# Altium PCB RcMPPT-SCC.PcbDoc
Units mm, origin at the board's own origin, x right, y up, seen from the top; angles counter-clockwise.
Board outline 99.06 x 55.88 mm, 4 copper layers (Top Layer, Mid Layer 1, Mid Layer 2, Bottom Layer), stack 1.531 mm thick; 156 components, 104 nets, 651 pads, 24 vias.
Unrouted connection lines stored in the file: 341.
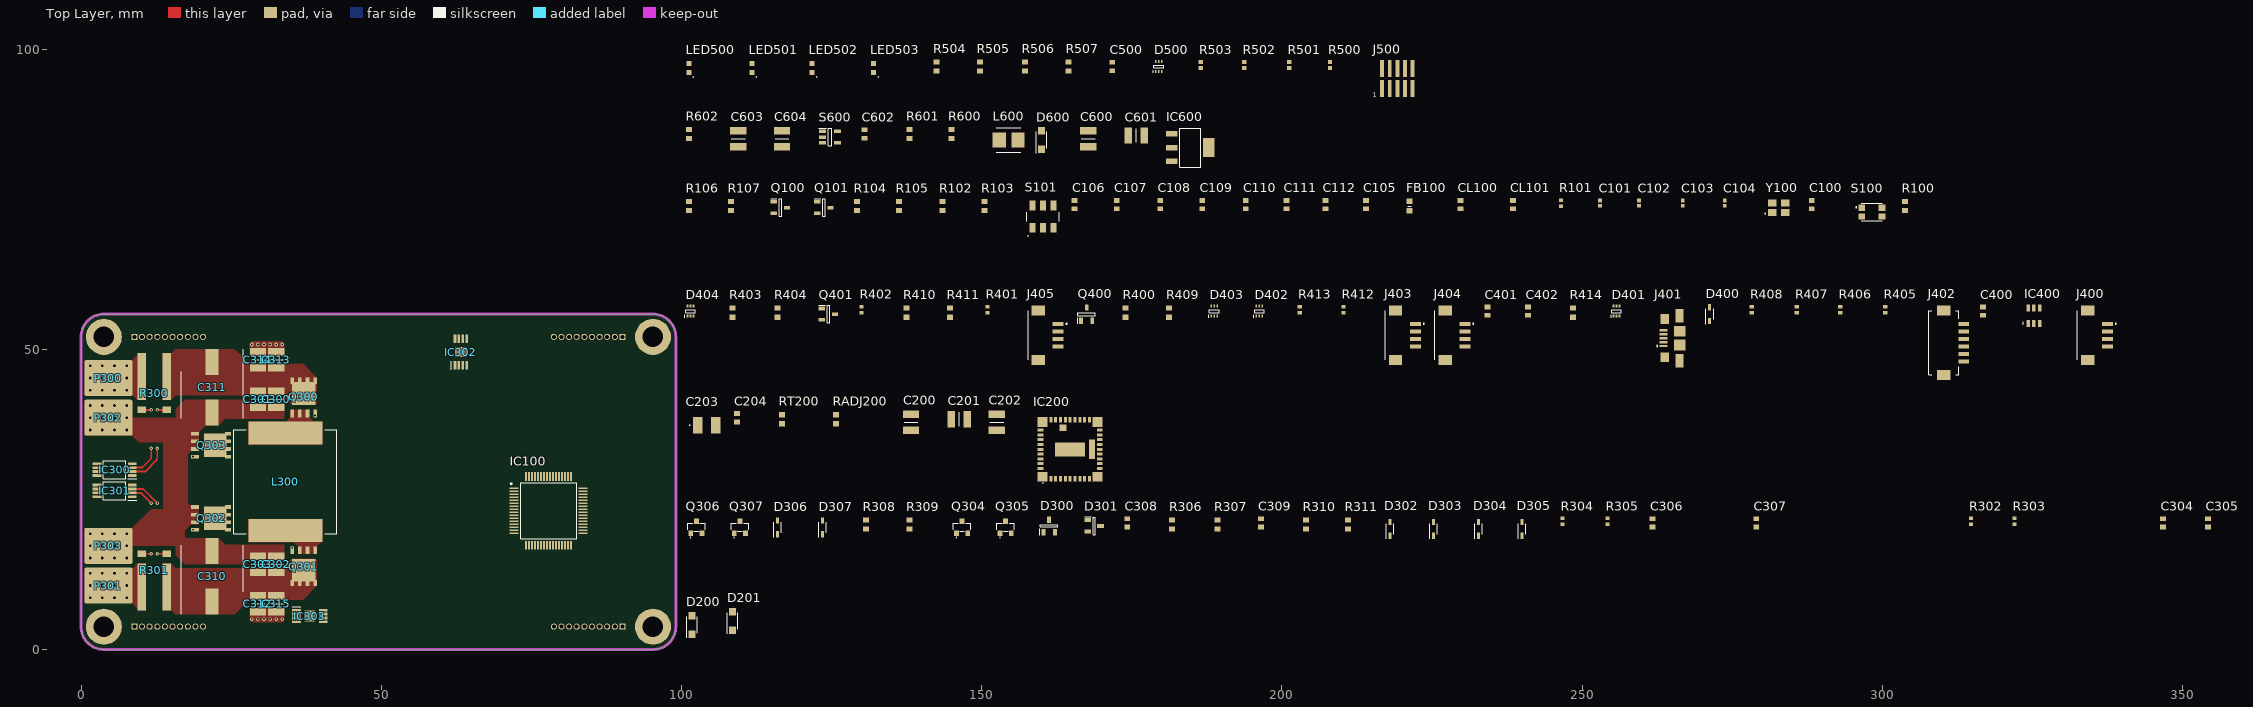
[diagram p0: Top Layer view]
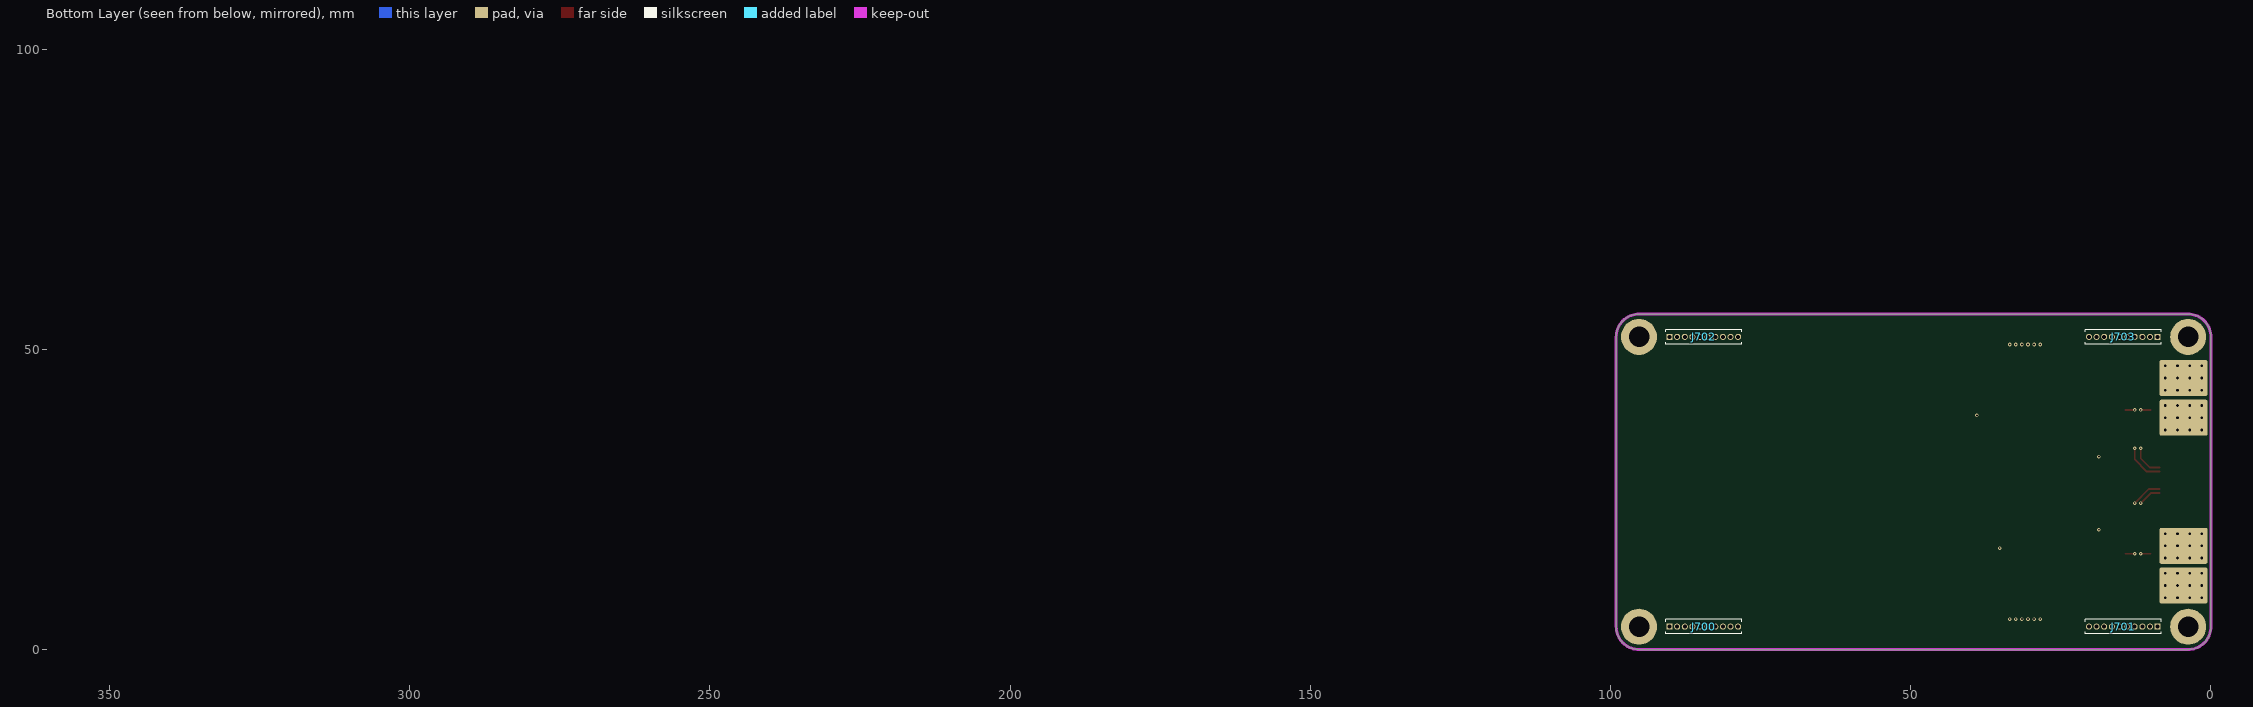
[diagram p1: Bottom Layer view, seen from below]
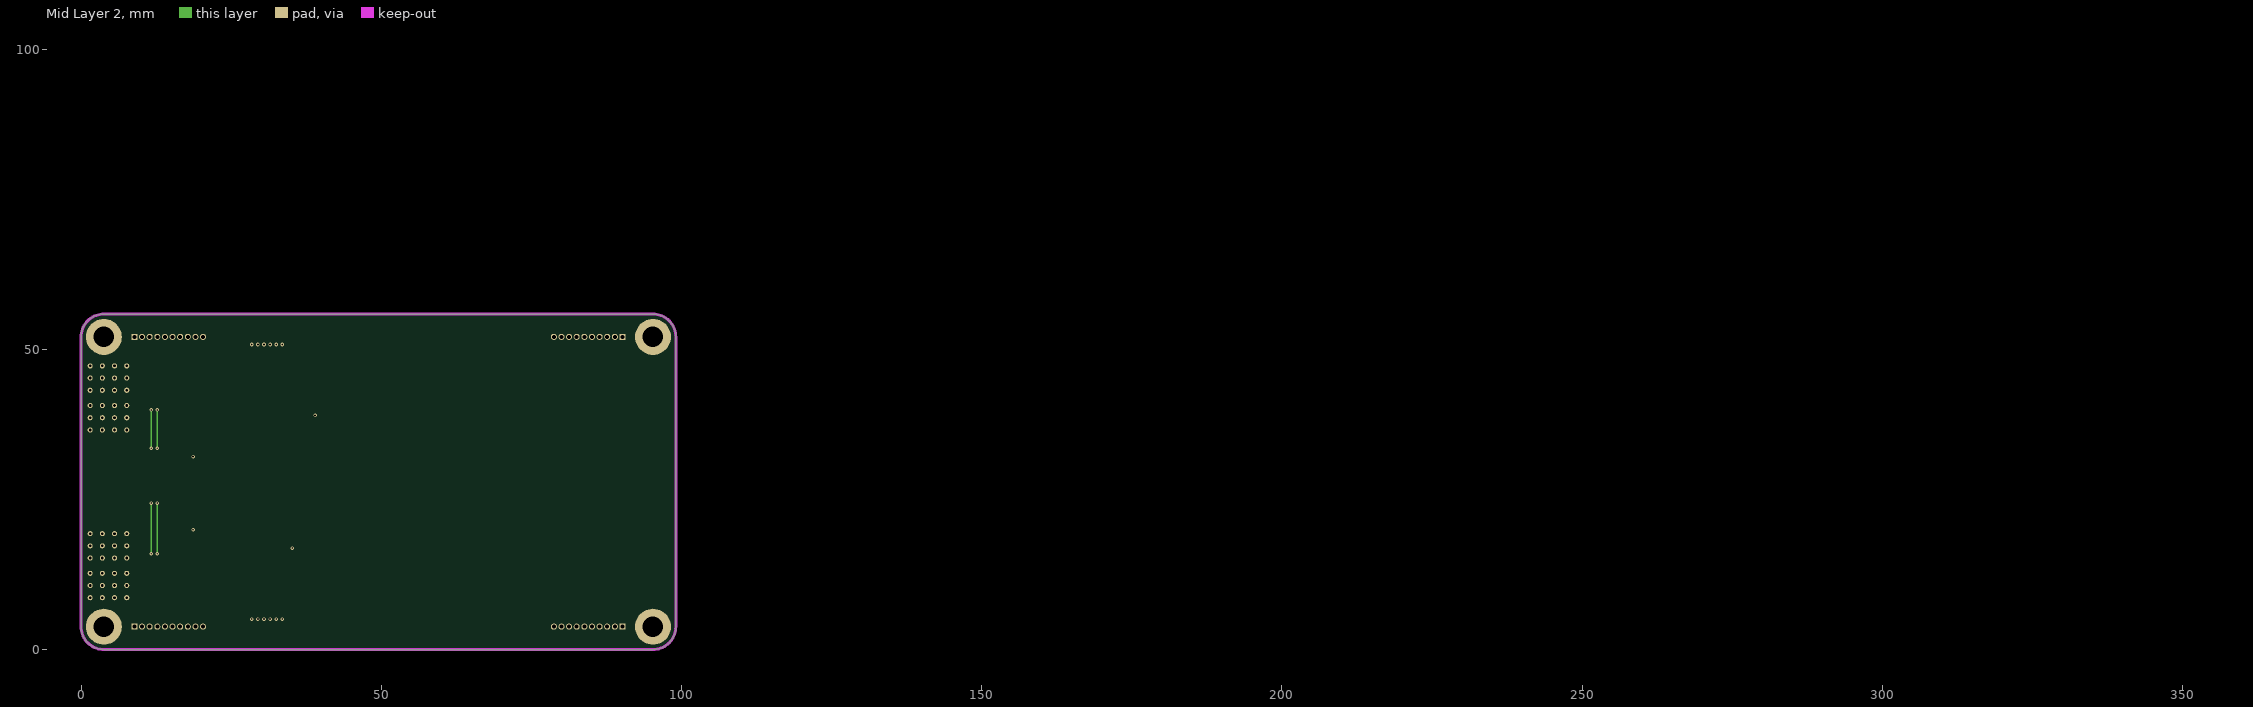
[diagram p2: Mid Layer 2]

## Layer stack, top to bottom
Top Solder: solder mask 0.0127, Solder Resist, Dk 3.8
Top Layer: signal copper 0.035
Dielectric 1: prepreg 0.1803, 7628, Dk 4.6
Mid Layer 1: signal copper 0.0175
Core: core 1.065, FR-4, Dk 4.5
Mid Layer 2: signal copper 0.0175
Dielectric 2: prepreg 0.1803, 7628, Dk 4.6
Bottom Layer: signal copper 0.035
Bottom Solder: solder mask 0.0127, Solder Resist, Dk 3.8

## Board outline
0,3.81 ccw(c3.81,3.81) 3.81,0 95.25,0 ccw(c95.25,3.81) 99.06,3.81 99.06,52.07 ccw(c95.25,52.07) 95.25,55.88 3.81,55.88 ccw(c3.81,52.07) 0,52.07

## Design rules (kind name [scope] priority, off if disabled: settings)
AcuteAngle [All] p1: minimum=6.00000000000000E+0001 checktracksonly=FALSE
BoardOutlineClearance [All] p1: gap=0.4 ignorepadtopadclearanceinfootprint=FALSE
Clearance [All] p1: gap=0.102 ignorepadtopadclearanceinfootprint=FALSE except(0.127: Arc-Arc Arc-Track Track-Track SMDPad-SMDPad SMDPad-Via THPad-Via Via-Fill Via-Poly Via-Region Via-Text; 0.2: Arc-SMDPad Track-SMDPad; 0.25: Arc-Hole Track-Hole SMDPad-Hole THPad-Hole Via-Hole Fill-Hole Poly-Hole Region-Hole Text-Hole; 0.254: Arc-Via Track-Via Via-Via; 0.33: Arc-THPad Track-THPad)
ComponentClearance [All] p1: gap=0.102 collisioncheckmode=3 verticalgap=0.102 showdistances=TRUE
DiffPairsRouting "Schematic Differential Pairs Routing_1" [InDifferentialPairClass('USB-CON')] p1: maxlimit=0.203 minlimit=0.203 mostfreqgap=0.203 toplayer_minwidth=0.261 toplayer_maxwidth=0.261 toplayer_prefwidth=0.261 bottomlayer_minwidth=0.261 bottomlayer_maxwidth=0.261 bottomlayer_prefwidth=0.261 impedanceprofiledriven=TRUE impedanceprofileid={FED37976-4A96-4117-917E-B578259A096B} impedanceprofilevalue=90.000000 maxuncoupledlength=12.7
DiffPairsRouting "Schematic Differential Pairs Routing" [InDifferentialPairClass('USB-MCU')] p2: maxlimit=0.203 minlimit=0.203 mostfreqgap=0.203 toplayer_minwidth=0.261 toplayer_maxwidth=0.261 toplayer_prefwidth=0.261 bottomlayer_minwidth=0.261 bottomlayer_maxwidth=0.261 bottomlayer_prefwidth=0.261 impedanceprofiledriven=TRUE impedanceprofileid={FED37976-4A96-4117-917E-B578259A096B} impedanceprofilevalue=90.000000 maxuncoupledlength=12.7
DiffPairsRouting [All] p3: maxlimit=0.102 minlimit=0.102 mostfreqgap=0.102 toplayer_minwidth=0.102 toplayer_maxwidth=1816.048 toplayer_prefwidth=0.102 midlayer1_minwidth=0.102 midlayer1_maxwidth=1816.048 midlayer1_prefwidth=0.102 midlayer2_minwidth=0.102 midlayer2_maxwidth=1816.048 midlayer2_prefwidth=0.102 bottomlayer_minwidth=0.102 bottomlayer_maxwidth=1816.048 bottomlayer_prefwidth=0.102 maxuncoupledlength=12.7
Height [All] p1: minheight=0 maxheight=1816.048 prefheight=12.7
HoleSize [All] p1: absolutevalues=TRUE maxlimit=6.3 minlimit=0.45 maxpercent=80.000 minpercent=20.000
HoleToHoleClearance [All] p1: gap=0.5 allowstackedmicrovias=FALSE
MinimumAnnularRing [All] p1: minimumring=0.13
MinimumSolderMaskSliver [All] p1: minsoldermaskwidth=0.1
PlaneClearance [All] p1: clearance=0.102
PlaneConnect PlaneConnectPowerPads [InPadClass('PowerPads')] p1: planeconnectstyle=Direct reliefexpansion=0.508 reliefentries=4 reliefconductorwidth=0.254 reliefairgap=0.254
PlaneConnect [All] p2: pad.planeconnectstyle=Relief pad.reliefexpansion=0.3 pad.reliefentries=4 pad.reliefconductorwidth=0.102 pad.reliefairgap=0.102 via.planeconnectstyle=Direct via.reliefexpansion=0.3 via.reliefentries=4 via.reliefconductorwidth=0.127 via.reliefairgap=0.127
PolygonConnect PolygonConnectPowerPads [All vs (InPadClass('PowerPads'))] p1: connectstyle=Direct reliefconductorwidth=0.254 reliefentries=4 polygonreliefangle="90 Angle" airgapwidth=0.254
PolygonConnect [All] p2: thpad.connectstyle=Relief thpad.reliefconductorwidth=0.102 thpad.reliefentries=4 thpad.polygonreliefangle="90 Angle" thpad.airgapwidth=0.102 smdpad.connectstyle=Relief smdpad.reliefconductorwidth=0.102 smdpad.reliefentries=4 smdpad.polygonreliefangle="90 Angle" smdpad.airgapwidth=0.102 via.connectstyle=Direct via.reliefconductorwidth=0.127 via.reliefentries=4 via.polygonreliefangle="90 Angle" via.airgapwidth=0.127
RoutingVias [All] p1: holewidth=0.3 width=0.6 viastyle="Through Hole" minholewidth=0.2 minwidth=0.4 maxholewidth=10 maxwidth=10
SilkToSilkClearance [All] p1: silktosilkclearance=0
SilkToSolderMaskClearance [IsPad] p1: minsilkscreentomaskgap=0.15 clearancetoexposedcopper=TRUE
SolderMaskExpansion "SolderMaskExpansion Vias" [IsVia] p1: expansion=0.102 istentingtop=TRUE
SolderMaskExpansion [All] p2: expansion=0.05 istentingtop=FALSE
Width [All] p1: maxlimit=50 minlimit=0.102 preferedwidth=0.3 midlayer1_minwidth=0.127 midlayer2_minwidth=0.127 minimp=50.000000 maximp=50.000000 favimp=50.000000
20 further rules are at their usual default settings.

## Classes and differential pairs
component class "BMS Interface": J700 J701 J702 J703
differential pair class USB-MCU: USB-MCU.USBD
component class "Supply Rail Generation": C600 C601 C602 C603 C604 D600 IC600 L600 R600 R601 R602 S600
differential pair class USB-CON: USB-CON
component class "SWD and LED Debug": C500 D500 J500 LED1 LED2 LED3 LED4 LED500 LED501 LED502 LED503 R5 R6 R7 R8 R500 R501 R502 R503 R504 R505 R506 R507
component class "STM32 MCU and Peripherals": C100 C101 C102 C103 C104 C105 C106 C107 C108 C109 C110 C111 C112 CL100 CL101 FB100 IC100 LED100 LED101 LED102 LED103 Q100 Q101 R100 R101 R102 R103 R104 R105 R106 R107 S100 S101 SW100 Y100
component class "RcMPPT Peripheral Interfaces": C400 C401 C402 D400 D401 D402 D403 D404 IC400 J400 J401 J402 J403 J404 J405 Q400 Q401 R400 R401 R402 R403 R404 R405 R406 R407 R408 R409 R410 R411 R412 R413 R414
component class "4 SW Buck Boost HW": C300 C301 C302 C303 C304 C305 C306 C307 C308 C309 C310 C311 C312 C313 C314 C315 D300 D301 D302 D303 D304 D305 D306 D307 IC300 IC301 IC302 IC303 L300 P300 P301 P302 P303 Q300 Q301 Q302 Q303 Q304 Q305 Q306 Q307 R300 R301 R302 R303 R304 R305 R306 R307 R308 R309 R310 R311
component class "Integrated Inductor Buck Supply": C200 C201 C202 C203 C204 D200 D201 IC200 RADJ200 RT200
differential pair USB-MCU.USBD: +USB-MCU.USBD_P -USB-MCU.USBD_N
differential pair USB-CON: +USB-CON_P -USB-CON_N

## Components (designator, comment, footprint, x,y, rotation, side; value= is the part's Value field where it differs from the comment)
C100 "100nF 3V3" CAPC1608X97N 288.229,74.1 r90 top
C101 "100nF 6.3V" CAPC1005X55N 252.979,74.35 r90 top
C102 "100nF 6.3V" CAPC1005X55N 259.479,74.35 r90 top
C103 "100nF 6.3V" CAPC1005X55N 266.729,74.35 r90 top
C104 "100nF 6.3V" CAPC1005X55N 273.729,74.35 r90 top
C105 "10nF" CAPC1608X97N 213.979,74.1 r90 top
C106 "100nF 3V3" CAPC1608X97N 165.479,74.1 r90 top
C107 "100nF 3V3" CAPC1608X97N 172.479,74.1 r90 top
C108 "100nF 3V3" CAPC1608X97N 179.729,74.1 r90 top
C109 "100nF 3V3" CAPC1608X97N 186.729,74.1 r90 top
C110 "100nF 3V3" CAPC1608X97N 193.979,74.1 r90 top
C111 "100nF 3V3" CAPC1608X97N 200.729,74.1 r90 top
C112 "10nF" CAPC1608X97N 207.229,74.1 r90 top
C200 "10uF 100V" CAPC3225X270N 138.23,37.85 r90 top
C201 "10uF 100V" CAPC3225X270N 146.23,38.35 r0 top
C202 "10uF 100V" CAPC3225X270N 152.48,37.85 r90 top
C203 "100uF 6.3V" POSCAP_B1_B1S_B1G_B15G_B2_B2S 104.23,37.35 r0 top
C204 "100nF" CAPC1608X97N 109.23,38.6 r90 top
C300 "10uF 100V" CAPC3225X270N 32.512,41.656 r270 top
C301 "10uF 100V" CAPC3225X270N 29.464,41.656 r270 top
C302 "10uF 100V" CAPC3225X270N 32.512,14.224 r90 top
C303 "10uF 100V" CAPC3225X270N 29.464,14.224 r90 top
C304 "100nF" CAPC1608X97N 346.729,21.1 r90 top
C305 "100nF" CAPC1608X97N 354.229,21.1 r90 top
C306 "10uF 20V" CAPC1608X97N 261.729,21.1 r90 top
C307 "10uF 20V" CAPC1608X97N 278.979,21.1 r90 top
C308 "10uF 20V" CAPC1608X97N 174.229,21.1 r90 top
C309 "10uF 20V" CAPC1608X97N 196.479,21.1 r90 top
C310 "47uF 100VDC 10mm" CAPAE1030X1050N 21.844,12.192 r90 top
C311 "47uF 100VDC 10mm" CAPAE1030X1050N 21.844,43.688 r270 top
C312 "10uF 100V" CAPC3225X270N 29.464,7.62 r270 top
C313 "10uF 100V" CAPC3225X270N 32.512,48.26 r90 top
C314 "10uF 100V" CAPC3225X270N 29.464,48.26 r90 top
C315 "10uF 100V" CAPC3225X270N 32.512,7.62 r270 top
C400 "100nF" CAPC1608X97N 316.729,56.35 r90 top
C401 "1nF" CAPC1608X97N 234.229,56.35 r90 top
C402 "100nF" CAPC1608X97N 240.979,56.35 r90 top
C500 "100nF" CAPC1608X97N 171.729,97.1 r90 top
C600 "10uF 25V" CAPC3225X270N 167.729,85.1 r90 top
C601 "10uF 25V" CAPC3225X270N 175.729,85.6 r0 top
C602 "270pF NP0" CAPC1608X97N 130.48,85.85 r90 top
C603 "10uF 25V X7R" CAPC3225X270N 109.48,85.1 r90 top
C604 "10uF 25V X7R" CAPC3225X270N 116.73,85.1 r90 top
CL100 "4nF" CAPC1608X97N 229.729,74.1 r90 top
CL101 "4nF" CAPC1608X97N 238.479,74.1 r90 top
D200 "100V 2A" SOD-123FL 101.73,4.1 r90 top
D201 "100V 2A" SOD-123FL 108.5,4.75 r90 top
D300 "BAT54SQ-7-F" SOT96P240X110-3N 161.229,20.6 r90 top
D301 "BAT54SQ-7-F" SOT96P240X110-3N 168.729,20.6 r0 top
D302 "100V 1A" SOD-323 217.979,20.1 r90 top
D303 "100V 1A" SOD-323 225.229,20.1 r90 top
D304 "100V 1A" SOD-323 232.729,20.1 r90 top
D305 "100V 1A" SOD-323 239.979,20.1 r90 top
D306 "30V 1A" SOD-323 115.98,20.35 r90 top
D307 "30V 1A" SOD-323 123.48,20.35 r90 top
D400 "30V 1A" SOD-323 271.229,55.85 r90 top
D401 "D5V0F4U6V-7" SOTFL50P162X60-6N 255.729,56.35 r90 top
D402 "D5V0F4U6V-7" SOTFL50P162X60-6N 196.229,56.35 r90 top
D403 "D5V0F4U6V-7" SOTFL50P162X60-6N 188.729,56.35 r90 top
D404 "D5V0F4U6V-7" SOTFL50P162X60-6N 101.48,56.35 r90 top
D500 "D5V0F4U6V-7" SOTFL50P162X60-6N 179.479,97.1 r90 top
D600 "20V 1A/45A" SOD-123FL 159.979,84.85 r90 top
FB100 "220R @ 100MHz" FB0603 221.229,73.85 r90 top
IC100 "STM32G474RBT6" QFP50P1200X1200X160-64N 77.874,23.11 r0 top
IC200 "LMZ36002RVQT" LMZ36002RVQR 164.729,33.35 r0 top
IC300 "INA240A4PWR" SOP65P640X120-8N 5.588,29.972 r180 top
IC301 "INA240A4PWR" SOP65P640X120-8N 5.588,26.416 r180 top
IC302 "LTC4444EMS8E-5#PBF" SOP65P490X110-9N 63.246,49.53 r90 top
IC303 "LTC4444EMS8E-5#PBF" SOP65P490X110-9N 38.1,5.588 r0 top
IC400 "USBLC6-2SC6" SOT95P280X145-6N 325.229,55.6 r90 top
IC600 "3V3 >800mA" SOT230P700X180-4N 184.729,83.6 r0 top
J400 "DF13A-4P-1.25H_21_" DF13A4P125H21 334.979,52.35 r90 top
J401 "1981584-1" 19815841 266.229,51.85 r90 top
J402 "DF13A-6P-1.25H_21_" DF13A6P125H21 310.229,51.1 r90 top
J403 "DF13A-4P-1.25H_21_" DF13A4P125H21 219.729,52.35 r90 top
J404 "DF13A-4P-1.25H_21_" DF13A4P125H21 227.979,52.35 r90 top
J405 "DF13A-4P-1.25H_21_" DF13A4P125H21 160.229,52.35 r90 top
J500 "SWD Connector" HUSSP10W40P127_2X5_635X340X420P 219.229,95.1 r0 top
J700 "TMS-110-01-G-S" SAMTEC_TMS-110-01-G-S 84.459,3.814 r180 bottom locked
J701 "TMS-110-01-G-S" SAMTEC_TMS-110-01-G-S 14.609,3.814 r0 bottom locked
J702 "TMS-110-01-G-S" SAMTEC_TMS-110-01-G-S 84.459,52.074 r180 bottom locked
J703 "TMS-110-01-G-S" SAMTEC_TMS-110-01-G-S 14.609,52.074 r0 bottom locked
L300 "IHLP6767GZER2R2M01" FP-IHLP-6767GZ-FP_3_825X1-MFG 34.036,27.94 r270 top
L600 "78438357100" INDPM4141X310N 154.479,84.85 r0 top
LED500 "Green" CHIPLED_0603 101.23,96.85 r90 top
LED501 "Green" CHIPLED_0603 111.73,96.85 r90 top
LED502 "Green" CHIPLED_0603 121.73,96.85 r90 top
LED503 "Green" CHIPLED_0603 131.98,96.85 r90 top
P300 "PowerPad" POWER_PAD 4.572,45.212 r180 top
P301 "PowerPad" POWER_PAD 4.572,10.668 r180 top
P302 "PowerPad" POWER_PAD 4.572,38.608 r180 top
P303 "PowerPad" POWER_PAD 4.572,17.272 r180 top
Q100 "BC847A" SOT95P230X110-3N 116.48,73.6 r0 top
Q101 "BC847A" SOT95P230X110-3N 123.73,73.6 r0 top
Q300 "SIR680ADP-T1-RE3" SI7141DPT1GE3 37.084,42.122 r90 top
Q301 "SIR680ADP-T1-RE3" SI7141DPT1GE3 37.084,13.758 r270 top
Q302 "SIR680ADP-T1-RE3" SI7141DPT1GE3 21.802,21.844 r0 top
Q303 "SIR680ADP-T1-RE3" SI7141DPT1GE3 21.802,34.036 r0 top
Q304 "100V 2A" SI2305TP 146.73,20.35 r0 top
Q305 "100V 2A" SI2305TP 153.979,20.35 r0 top
Q306 "100V 2A" SI2305TP 102.48,20.35 r0 top
Q307 "100V 2A" SI2305TP 109.73,20.35 r0 top
Q400 "BC847A" SOT95P230X110-3N 167.479,55.85 r90 top
Q401 "BC847A" SOT95P230X110-3N 124.48,55.85 r0 top
R100 "10k" RESC1608X50N 303.729,73.85 r90 top
R101 "22R" RESC1005X40N 246.479,74.35 r90 top
R102 "10k" RESC1608X50N 143.48,73.85 r90 top
R103 "10k" RESC1608X50N 150.48,73.85 r90 top
R104 "2k" RESC1608X50N 129.23,73.85 r90 top
R105 "2k" RESC1608X50N 136.23,73.85 r90 top
R106 "1k" RESC1608X50N 101.23,73.85 r90 top
R107 "1k" RESC1608X50N 108.23,73.85 r90 top
R300 "5mR 4W" FC4L90R005FER 12.192,44.196 r180 top
R301 "5mR 4W" FC4L90R005FER 12.192,11.684 r0 top
R302 "18k" RESC1005X40N 314.729,21.35 r90 top
R303 "18k" RESC1005X40N 321.979,21.35 r90 top
R304 "2k" RESC1005X40N 246.729,21.35 r90 top
R305 "2k" RESC1005X40N 254.229,21.35 r90 top
R306 "82k" RESC1608X50N 181.729,20.85 r90 top
R307 "82k" RESC1608X50N 189.229,20.85 r90 top
R308 "4k3" RESC1608X50N 130.73,20.85 r90 top
R309 "4k3" RESC1608X50N 137.98,20.85 r90 top
R310 "2k" RESC1608X50N 203.979,20.85 r90 top
R311 "2k" RESC1608X50N 210.979,20.85 r90 top
R400 "10k" RESC1608X50N 173.979,56.1 r90 top
R401 "100R" RESC1005X40N 150.98,56.6 r90 top
R402 "100R" RESC1005X40N 129.98,56.6 r90 top
R403 "10k" RESC1608X50N 108.48,56.1 r90 top
R404 "10k" RESC1608X50N 115.98,56.1 r90 top
R405 "100R" RESC1005X40N 300.479,56.6 r90 top
R406 "100R" RESC1005X40N 292.979,56.6 r90 top
R407 "100R" RESC1005X40N 285.729,56.6 r90 top
R408 "100R" RESC1005X40N 278.229,56.6 r90 top
R409 "10k" RESC1608X50N 181.229,56.1 r90 top
R410 "1k" RESC1608X50N 137.48,56.1 r90 top
R411 "1k" RESC1608X50N 144.73,56.1 r90 top
R412 "100R" RESC1005X40N 210.229,56.6 r90 top
R413 "100R" RESC1005X40N 202.979,56.6 r90 top
R414 "1M" RESC1608X50N 248.479,56.1 r90 top
R500 "100R" RESC1005X40N 207.979,97.35 r90 top
R501 "100R" RESC1005X40N 201.229,97.35 r90 top
R502 "100R" RESC1005X40N 193.729,97.35 r90 top
R503 "100R" RESC1005X40N 186.479,97.35 r90 top
R504 "1k" RESC1608X50N 142.48,97.1 r90 top
R505 "1k" RESC1608X50N 149.73,97.1 r90 top
R506 "1k" RESC1608X50N 157.229,97.1 r90 top
R507 "1k" RESC1608X50N 164.479,97.1 r90 top
R600 "118k" RESC1608X50N 144.98,85.85 r90 top
R601 "1M" RESC1608X50N 137.98,85.85 r90 top
R602 "13k3" RESC1608X50N 101.23,85.85 r90 top
RADJ200 "5.05k 1%" RESC1608X50N 125.73,38.35 r90 top
RT200 "49.9k 1%" RESC1608X50N 116.73,38.35 r90 top
S100 "434153017835" 434153017835 298.229,72.85 r0 top
S101 "CAS-D20A1" CASD20A1 160.229,72.1 r0 top
S600 "LMR62014XMF_NOPB" SOT95P280X145-5N 124.73,85.35 r0 top
Y100 "16Mhz 8pF" ABM8W160000MHZ8B1UT3 282.729,73.6 r0 top

## Footprints (in the part's own frame and the unit in brackets; to place one, negate y for a bottom-side part, rotate by r counter-clockwise, add the part's x,y. Pads: shape width x height; smd on the part's side, far side on the other; paste and mask are expansions set on the pad)
19815841 [mm]
  rect 0.4x1.35 smd: 1(-1.3,2.675) 2(-0.65,2.675) 3(0,2.675) 4(0.65,2.675) 5(1.3,2.675)
  rect 1.6x1.4 smd: 6(-3.2,2.45) 7(3.2,2.45)
  rect 2.3x1.3 smd: 8(-3.75,0) 9(3.75,0)
  rect 1.8x1.9 smd: 10(-1.15,0) 11(1.15,0)
  silkscreen extent -1.4,3.65 -1.2,3.85, body extent -4.4,-2.93 4.4,2.68, height 2.8
434153017835 [mm]
  rect 1.15x1.05 smd: 1(-1.675,0.725) 2(-1.675,-0.725) 3(1.675,-0.725) 4(1.675,0.725)
  silkscreen extent -2.7,-1.45 1.75,1.45, body extent -2.14,-1.45 2.14,1.45, height 1.1
ABM8W160000MHZ8B1UT3 [mm]
  rect 1.4x1.15 smd: 1(-1.1,-0.8) 2(1.1,-0.8) 3(1.1,0.8) 4(-1.1,0.8)
  silkscreen extent -2.3,-1.05 -2.2,-0.95, body extent -1.69,-1.26 1.69,1.26, height 0.85
CAPAE1030X1050N [mm]
  rect 4.3x2.15 smd: 1(-4.2,0) 2(4.2,0)
  silkscreen extent -6.35,-5.15 5.15,5.15, body extent -5.65,-5.25 5.65,5.25, height 10.5
CAPC1005X55N [mm]
  rect 0.65x0.62 smd: 1(-0.44,0) 2(0.44,0)
  body extent -0.5,-0.25 0.5,0.25, height 0.55
CAPC1608X97N [mm]
  rect 0.78x0.98 smd: 1(-0.7,0) 2(0.7,0)
  body extent -0.8,-0.4 0.8,0.4, height 0.97
CAPC3225X270N [mm]
  rect 1.26x2.72 smd: 1(-1.33,0) 2(1.33,0)
  silkscreen extent 0,-1.15 0,1.15, body extent -1.6,-1.25 1.6,1.25, height 2.7
CASD20A1 [mm]
  rect 1x1.6 smd: 1(-1.75,-1.85) 2(0,-1.85) 3(1.75,-1.85) 4(-1.75,1.85) 5(0,1.85) 6(1.75,1.85)
  silkscreen extent -2.7,-3.3 2.7,0.75, body extent -2.7,-2.55 2.7,2.55, height 2.6
CHIPLED_0603 [mm]
  rect 0.8x0.8 smd: 1(-0.75,0) 2(0.75,0)
  silkscreen extent -1.52,-0.76 -1.47,-0.76, body extent -0.8,-0.4 0.8,0.4, height 0.5
DF13A4P125H21 [mm]
  rect 0.7x1.8 smd: 1(1.875,-2.5) 2(0.625,-2.5) 3(-0.625,-2.5) 4(-1.875,-2.5)
  rect 1.6x2.2 smd: MP1(-4.125,0.8) MP2(4.125,0.8)
  silkscreen extent -4.08,-4 4.08,2.5, body extent -4.76,-3.33 4.76,2.5, height 3.7
DF13A6P125H21 [mm]
  rect 0.7x1.8 smd: 1(-3.125,-3.3) 2(-1.875,-3.3) 3(-0.625,-3.3) 4(0.625,-3.3) 5(1.875,-3.3) 6(3.125,-3.3)
  rect 1.6x2.2 smd: MP1(-5.375,0) MP2(5.375,0)
  silkscreen extent -5.33,-2.5 5.33,2.5, body extent -6.01,-4.13 6.01,2.5, height 3.85
FB0603 [mm]
  rect 0.9x1 smd: 1(-0.8,0) 2(0.8,0)
  silkscreen extent 0,-0.3 0,0.3, body extent -0.8,-0.4 0.8,0.4, height 0.75
FC4L90R005FER [mm]
  rect 1.4x1.1 smd: 1(-2.1,4.275) 4(2.1,4.275)
  rect 1.4x7.8 smd: 2(-2.1,-1.275) 3(2.1,-1.275)
  body extent -2.69,-5.03 2.69,4.71, height 0.9
FP-IHLP-6767GZ-FP_3_825X1-MFG [mm]
  rect 3.825x12.32 smd paste+0 mask+0: 1(-8.117,0) 2(8.117,0)
  silkscreen extent -8.64,-8.57 8.64,8.57, body extent -10.13,-8.67 10.13,8.67, height 0.25
HUSSP10W40P127_2X5_635X340X420P [mm]
  rect 0.65x2.85 smd: 1(-2.54,-1.675) 2(-2.54,1.675) 3(-1.27,-1.675) 4(-1.27,1.675) 5(0,-1.675) 6(0,1.675) 7(1.27,-1.675) 8(1.27,1.675) 9(2.54,-1.675) 10(2.54,1.675)
  body extent -3.32,-2.75 3.32,2.75, height 5.13
INDPM4141X310N [mm]
  rect 2.2x2.5 smd: 1(-1.55,0) 2(1.55,0)
  silkscreen extent -2.05,-2.05 2.05,2.05, body extent -2.05,-2.05 2.05,2.05, height 3.1
LMZ36002RVQR [mm]
  rect 1.65x1.65 smd: 1(-4.575,-4.575) 11(4.575,-4.575) 21(4.575,4.575) 31(-4.575,4.575)
  rect 0.5x0.95 smd: 2(-3.2,-4.925) 3(-2.4,-4.925) 4(-1.6,-4.925) 5(-0.8,-4.925) 6(0,-4.925) 7(0.8,-4.925) 8(1.6,-4.925) 9(2.4,-4.925) 10(3.2,-4.925) 22(3.2,4.925) 23(2.4,4.925) 24(1.6,4.925) 25(0.8,4.925) 26(0,4.925) 27(-0.8,4.925) 28(-1.6,4.925) 29(-2.4,4.925) 30(-3.2,4.925)
  rect 0.95x0.5 smd: 12(4.925,-3.2) 13(4.925,-2.4) 14(4.925,-1.6) 15(4.925,-0.8) 16(4.925,0) 17(4.925,0.8) 18(4.925,1.6) 19(4.925,2.4) 20(4.925,3.2) 32(-4.925,3.2) 33(-4.925,2.4) 34(-4.925,1.6) 35(-4.925,0.8) 36(-4.925,0) 37(-4.925,-0.8) 38(-4.925,-1.6) 39(-4.925,-2.4) 40(-4.925,-3.2)
  rect 5x2.35 smd: 41(0,0)
  rect 1.12x1.05 smd: 42(-1.187,3.575)
  rect 1x3.3 smd: 43(3.6,0)
  silkscreen extent -4.6,-5.65 -4.5,-5.55, body extent -5,-5 5,5, height 4.2
POSCAP_B1_B1S_B1G_B15G_B2_B2S [mm]
  rect 1.6x2.7 smd: 1(-1.5,0) 2(1.5,0)
  silkscreen extent -2.9,-0.05 -2.8,0.05, body extent -1.72,-1.4 1.78,1.4, height 1.13
POWER_PAD [mm]
  round 0.85 hole 0.45: 1(-3.048,2.032) 1(-3.048,0) 1(-3.048,-2.032) 1(-1.016,2.032) 1(-1.016,0) 1(-1.016,-2.032) 1(1.016,2.032) 1(1.016,0) 1(1.016,-2.032) 1(3.048,2.032) 1(3.048,0) 1(3.048,-2.032)
  rrect10% 8x6 smd: 1(0,0)
  rrect10% 8x6 smd far side: 1(0,0)
QFP50P1200X1200X160-64N [mm]
  rect 1.475x0.298 smd: 1(-5.738,3.75) 2(-5.738,3.25) 3(-5.738,2.75) 4(-5.738,2.25) 5(-5.738,1.75) 6(-5.738,1.25) 7(-5.738,0.75) 8(-5.738,0.25) 9(-5.738,-0.25) 10(-5.738,-0.75) 11(-5.738,-1.25) 12(-5.738,-1.75) 13(-5.738,-2.25) 14(-5.738,-2.75) 15(-5.738,-3.25) 16(-5.738,-3.75) 33(5.738,-3.75) 34(5.738,-3.25) 35(5.738,-2.75) 36(5.738,-2.25) 37(5.738,-1.75) 38(5.738,-1.25) 39(5.738,-0.75) 40(5.738,-0.25) 41(5.738,0.25) 42(5.738,0.75) 43(5.738,1.25) 44(5.738,1.75) 45(5.738,2.25) 46(5.738,2.75) 47(5.738,3.25) 48(5.738,3.75)
  rect 0.298x1.475 smd: 17(-3.75,-5.738) 18(-3.25,-5.738) 19(-2.75,-5.738) 20(-2.25,-5.738) 21(-1.75,-5.738) 22(-1.25,-5.738) 23(-0.75,-5.738) 24(-0.25,-5.738) 25(0.25,-5.738) 26(0.75,-5.738) 27(1.25,-5.738) 28(1.75,-5.738) 29(2.25,-5.738) 30(2.75,-5.738) 31(3.25,-5.738) 32(3.75,-5.738) 49(3.75,5.738) 50(3.25,5.738) 51(2.75,5.738) 52(2.25,5.738) 53(1.75,5.738) 54(1.25,5.738) 55(0.75,5.738) 56(0.25,5.738) 57(-0.25,5.738) 58(-0.75,5.738) 59(-1.25,5.738) 60(-1.75,5.738) 61(-2.25,5.738) 62(-2.75,5.738) 63(-3.25,5.738) 64(-3.75,5.738)
  silkscreen extent -6.35,-4.65 4.65,4.65, body extent -6,-6 6,6, height 1.6
RESC1005X40N [mm]
  rect 0.6x0.7 smd: 1(-0.5,0) 2(0.5,0)
  body extent -0.5,-0.25 0.5,0.25, height 0.4
RESC1608X50N [mm]
  rect 0.85x1 smd: 1(-0.75,0) 2(0.75,0)
  body extent -0.79,-0.43 0.79,0.43, height 0.5
SAMTEC_TMS-110-01-G-S [mm]
  rect 1.01x1.01 hole 0.66: 01(-5.715,0)
  round 1.01 hole 0.66: 02(-4.445,0) 03(-3.175,0) 04(-1.905,0) 05(-0.635,0) 06(0.635,0) 07(1.905,0) 08(3.175,0) 09(4.445,0) 10(5.715,0)
  silkscreen extent -6.35,-1.22 6.35,1.22, body extent -6.35,-1.22 6.35,1.22, height 8.43
SI2305TP [mm]
  rect 0.8x0.9 smd: 1(-0.95,-1) 2(0.95,-1) 3(0,1)
  silkscreen extent -1.46,-1.75 1.46,0.65, body extent -1.4,-1.05 1.4,1.05, height 0.89
SI7141DPT1GE3 [mm]
  rect 1.27x0.61 smd: 1(-2.81,1.905) 2(-2.81,0.635) 3(-2.81,-0.635) 4(-2.81,-1.905)
  rect 0.71x0.61 smd: 5(2.81,-1.905) 6(2.81,-0.635) 7(2.81,0.635) 8(2.81,1.905)
  rect 3.81x3.91 smd: 9(0.55,0)
  rect 0.32x0.255 smd: 10(2.3,2.083) 11(2.3,-2.083)
  body extent -3.38,-2.45 3.1,2.45, height 1.22
SOD-123FL [mm]
  rect 1.26x1.17 smd: 1(-1.525,0) 2(1.525,0)
  silkscreen extent -2.15,-0.86 1.38,0.86, body extent -1.8,-0.86 1.8,0.86, height 1.08
SOD-323 [mm]
  rect 1.05x0.5 smd: 1(-1.138,0) 2(1.138,0)
  silkscreen extent -1.66,-0.65 0.87,0.65, body extent -1.25,-0.65 1.25,0.65, height 1.1
SOP65P490X110-9N [mm]
  rect 1.425x0.45 smd: 1(-2.212,0.975) 2(-2.212,0.325) 3(-2.212,-0.325) 4(-2.212,-0.975) 5(2.212,-0.975) 6(2.212,-0.325) 7(2.212,0.325) 8(2.212,0.975)
  rect 1.68x1.88 smd: 9(0,0)
  silkscreen extent -2.93,1.55 -1.5,1.55, body extent -2.45,-1.5 2.45,1.5, height 1.1
SOP65P640X120-8N [mm]
  rect 1.475x0.45 smd: 1(-2.938,0.975) 2(-2.938,0.325) 3(-2.938,-0.325) 4(-2.938,-0.975) 5(2.938,-0.975) 6(2.938,-0.325) 7(2.938,0.325) 8(2.938,0.975)
  silkscreen extent -3.67,-1.5 1.85,1.55, body extent -3.21,-1.5 3.21,1.5, height 1.08
SOT95P230X110-3N [mm]
  rect 1.05x0.6 smd: 1(-1.1,0.95) 2(-1.1,-0.95) 3(1.1,0)
  silkscreen extent -1.63,-1.45 0.23,1.5, body extent -1.15,-1.45 1.15,1.45, height 1.1
SOT95P280X145-5N [mm]
  rect 1.2x0.6 smd: 1(-1.25,0.95) 2(-1.25,0) 3(-1.25,-0.95) 4(1.25,-0.95) 5(1.25,0.95)
  silkscreen extent -1.85,-1.45 0.3,1.5, body extent -1.4,-1.45 1.4,1.45, height 1.2
SOT95P280X145-6N [mm]
  rect 1.15x0.6 smd: 1(-1.3,0.95) 2(-1.3,0) 3(-1.3,-0.95) 4(1.3,-0.95) 5(1.3,0) 6(1.3,0.95)
  silkscreen extent -1.52,1.78 -1.02,1.78, body extent -1.4,-1.46 1.4,1.46, height 1.45
SOT96P240X110-3N [mm]
  rect 1.1x0.65 smd: 1(-1.05,0.96) 2(-1.05,-0.96) 3(1.05,0)
  silkscreen extent -1.6,-1.45 0.15,1.54, body extent -1.2,-1.45 1.2,1.45, height 1.1
SOT230P700X180-4N [mm]
  rect 1.9x0.9 smd: 1(-3.05,2.3) 2(-3.05,0) 3(-3.05,-2.3)
  rect 1.9x3.2 smd: 4(3.05,0)
  silkscreen extent -1.75,-3.25 1.75,3.25, body extent -3.5,-3.25 3.5,3.25, height 1.8
SOTFL50P162X60-6N [mm]
  rect 0.492x0.3 smd: 1(-0.834,0.5) 2(-0.834,0) 3(-0.834,-0.5) 4(0.834,-0.5) 5(0.834,0) 6(0.834,0.5)
  silkscreen extent -1.08,-0.8 0.24,0.9, body extent -0.81,-0.8 0.81,0.8, height 0.6

## Part data
C100 C105 C106 C107 C108 C109 C110 C111 C112 C204 C304 C305 C306 C307 C308 C309 C400 C401 C402 C500 C602 CL100 CL101: library part C0603, "Capacitor", Height=0.97
C101 C102 C103 C104: library part C0402, "Capacitor"
C200 C201 C202 C300 C301 C302 C303 C312 C313 C314 C315 C600 C601 C603 C604: library part C1210, "Capacitor", Manufacturer_Name=Vishay, Manufacturer_Part_Number=VJ0603Y104JXJAC, Mouser Part Number=77-VJ0603Y104JXJAC, Datasheet Link=http://www.vishay.com/docs/45226/vj31xrohsautomlcc.pdf, Height=0.97mm, Mouser Price/Stock=https://www.mouser.com/Search/Refine.aspx?Keyword=77-VJ0603Y104JXJAC
C203: library part CTP1210, "Capacitor Polarised"
C310 C311: library part ELKO, "Capacitor Polarised"
D200 D201 D302 D303 D304 D305 D306 D307 D400 D600: library part SCHOTTKY-DIODE, "Schottky Diode"
D300 D301: "Schottky Diode", Manufacturer_Name="Diodes Inc.", Mouser Part Number=621-BAT54SQ-7-F, Arrow Part Number=BAT54SQ-7-F, Arrow Price/Stock=https://www.arrow.com/en/products/bat54sq-7-f/diodes-incorporated, Datasheet Link=https://www.arrow.com/en/products/bat54sq-7-f/diodes-incorporated, Height=1.1mm, Manufacturer_Part_Number=BAT54SQ-7-F, Mouser Price/Stock=https://www.mouser.co.uk/ProductDetail/Diodes-Incorporated/BAT54SQ-7-F/?qs=vdQOMtKMWaAKaYcjx11stw%3D%3D
D401 D402 D403 D404 D500: "TVS Diode Array", Manufacturer_Name="Diodes Inc.", Mouser Part Number=621-D5V0F4U6V-7, Arrow Part Number=D5V0F4U6V-7, Arrow Price/Stock=https://www.arrow.com/en/products/d5v0f4u6v-7/diodes-incorporated, Datasheet Link=https://www.diodes.com/assets/Datasheets/D5V0F4U6V.pdf, Height=0.6mm, Manufacturer_Part_Number=D5V0F4U6V-7, Mouser Price/Stock=https://www.mouser.com/Search/Refine.aspx?Keyword=621-D5V0F4U6V-7
FB100: library part FB0603, "Ferrite Bead", Arrow Part Number=MPZ1608S221ATA00, Manufacturer_Name=TDK, Mouser Part Number=810-MPZ1608S221ATA00, Arrow Price/Stock=https://www.arrow.com/en/products/mpz1608s221ata00/tdk?region=nac, Datasheet Link=https://product.tdk.com/system/files/dam/doc/product/emc/emc/beads/catalog/beads_commercial_power_mpz1608_en.pdf, Height=0.75mm, Manufacturer_Part_Number=MPZ1608S221ATA00, Mouser Price/Stock=https://www.mouser.co.uk/ProductDetail/TDK/MPZ1608S221ATA00?qs=pLY5GE0xrmLZeKkazChaNg%3D%3D
IC100: "Integrated Circuit", Manufacturer_Name=STMicroelectronics, Mouser Part Number=511-STM32G474RBT6, Datasheet Link=https://www.mouser.com/datasheet/2/389/stm32g474cb-1600828.pdf, Height=1.6mm, Manufacturer_Part_Number=STM32G474RBT6, Mouser Price/Stock=https://www.mouser.co.uk/ProductDetail/STMicroelectronics/STM32G474RBT6?qs=uwxL4vQweFP0uAZUZXLBhQ%3D%3D
IC200: "Integrated Circuit", Manufacturer_Name="Texas Instruments", Mouser Part Number=595-LMZ36002RVQT, Arrow Part Number=LMZ36002RVQT, Arrow Price/Stock=https://www.arrow.com/en/products/lmz36002rvqt/texas-instruments, Datasheet Link=http://www.ti.com/lit/gpn/lmz36002, Height=2.13mm, Manufacturer_Part_Number=LMZ36002RVQT, Mouser Price/Stock=https://www.mouser.co.uk/ProductDetail/Texas-Instruments/LMZ36002RVQT?qs=kFLL9AfgRSBjXTxBMSjGOw%3D%3D
IC300 IC301: "Integrated Circuit", Manufacturer_Name="Texas Instruments", Mouser Part Number=595-INA240A4PWR, Arrow Part Number=INA240A4PWR, Arrow Price/Stock=https://www.arrow.com/en/products/ina240a4pwr/texas-instruments?region=nac, Datasheet Link=http://www.ti.com/lit/ds/symlink/ina240.pdf, Height=1.2mm, Manufacturer_Part_Number=INA240A4PWR, Mouser Price/Stock=https://www.mouser.co.uk/ProductDetail/Texas-Instruments/INA240A4PWR?qs=aVyJF2WnouQ31PAZ9p0r8w%3D%3D
IC302 IC303: "Integrated Circuit", Manufacturer_Name="Linear Technology", Mouser Part Number=584-C4444EMS8E-5PBF, Arrow Part Number=LTC4444EMS8E-5#PBF, Arrow Price/Stock=https://www.arrow.com/en/products/ltc4444ems8e-5pbf/linear-technology, Datasheet Link=http://www.linear.com/docs/26366, Height=1.1mm, Manufacturer_Part_Number=LTC4444EMS8E-5#PBF, Mouser Price/Stock=https://www.mouser.com/Search/Refine.aspx?Keyword=584-C4444EMS8E-5PBF
IC400: "Integrated Circuit", Manufacturer_Name=STMicroelectronics, Mouser Part Number=511-USBLC6-2SC6, Arrow Part Number=USBLC6-2SC6, Arrow Price/Stock=https://www.arrow.com/en/products/usblc6-2sc6/stmicroelectronics, Datasheet Link=http://www.st.com/st-web-ui/static/active/en/resource/technical/document/datasheet/CD00050750.pdf, Height=1.45mm, Manufacturer_Part_Number=USBLC6-2SC6, Mouser Price/Stock=https://www.mouser.co.uk/ProductDetail/STMicroelectronics/USBLC6-2SC6?qs=po45yt2pPpu%2FhNIlwQdTlg%3D%3D
IC600: library part LDO-SOT223, "LDO"
J400 J403 J404 J405: "Connector", Manufacturer_Name=Hirose, Manufacturer_Part_Number=DF13A-4P-1.25H(21), Mouser Part Number=798-DF13A4P125H21, Datasheet Link=https://componentsearchengine.com/Datasheets/1/DF13A-4P-1.25H(21).pdf, Height=3.6mm, Mouser Price/Stock=https://www.mouser.co.uk/ProductDetail/Hirose-Connector/DF13A-4P-125H21?qs=XQjbzJWzFPXWzMShI70F0w%3D%3D
J401: "Connector", Manufacturer_Name="TE Connectivity", Mouser Part Number=571-1981584-1, Arrow Part Number=1981584-1, Arrow Price/Stock=https://www.arrow.com/en/products/1981584-1/te-connectivity, Datasheet Link=http://www.te.com/commerce/DocumentDelivery/DDEController?Action=showdoc&DocId=Customer+Drawing%7F1981584%7FD2%7Fpdf%7FEnglish%7FENG_CD_1981584_D2.pdf%7F1981584-1, Height=3mm, Manufacturer_Part_Number=1981584-1, Mouser Price/Stock=https://www.mouser.co.uk/ProductDetail/TE-Connectivity/1981584-1?qs=ozkTL%2FUej0TLYxjQLPnd2Q%3D%3D
J402: "Connector", Arrow Part Number=DF13A-6P-1.25H(21), Manufacturer_Name=Hirose, Mouser Part Number=798-DF13A6P125H21, Arrow Price/Stock=https://www.arrow.com/en/products/df13a-6p-1.25h-21/hirose-electric, Datasheet Link=https://www.hirose.com/product/download/?distributor=digikey&type=2d&lang=en&num=DF13A-6P-1.25H(21), Height=3.75mm, Manufacturer_Part_Number=DF13A-6P-1.25H(21), Mouser Price/Stock=https://www.mouser.co.uk/ProductDetail/Hirose-Connector/DF13A-6P-125H21?qs=XQjbzJWzFPXnreVi%252BPl0Lg%3D%3D
J500: library part M50-3600542R, "Connector", Manufacturer_Name=Harwin, Mouser Part Number=855-M50-3600542R, Datasheet Link=https://cdn.harwin.com/pdfs/M50-360R.pdf, Manufacturer_Part_Number=M50-3600542R, Mouser Price/Stock=https://www.mouser.co.uk/ProductDetail/Harwin/M50-3600542R?qs=DVxm2sPGGrrPu%2FxuhpV3yw%3D%3D
J700 J701 J702 J703: Package=None, Availability=Unavailable, MF="{'manufacturer': u'Samtec'}", MP=TMS-110-01-G-S, Price=None
L300: "Commercial Inductors, High Saturation Series 2.2uH 35A 2.53mΩ 20%", Case/Package=6767, Current Rating=35A, DC Resistance (DCR)=2.53mR, Inductance=2.2uH, Inductance Tolerance=20%, Manufacturer="Vishay Dale", Max DC Current=62A, Max Operating Temperature=125°C, Min Operating Temperature=-55°C, Package Quantity=200, Self Resonant Frequency=2MHz, Test Frequency=100kHz, Core Material=Metal, Depth=17.15mm, Height=7mm, Height - Seated (Max)=0.276inch, Lead Free="Lead Free", Length=17.15mm, Manufacturer Part Number=IHLP6767GZER2R2M01, Military Standard=Not, Mount="Surface Mount", Number of Pins=6767, Packaging="Tape and Reel", Radiation Hardening=No, RMS Current (Irms)=35A, Saturation Current=62A, Shielding=Shielded, Termination=SMD/SMT, Tolerance=20%, Width=0.675inch
L600: "Inductor", Manufacturer_Name="Wurth Elektronik", Mouser Part Number=710-78438357100, Datasheet Link=https://katalog.we-online.de/pbs/datasheet/78438357100.pdf, Height=3.1mm, Manufacturer_Part_Number=78438357100, Mouser Price/Stock=https://www.mouser.co.uk/ProductDetail/Wurth-Elektronik/78438357100?qs=f9yNj16SXrI9saR5LXmRyQ%3D%3D
LED500 LED501 LED502 LED503: library part CHIPLED0603, "LED", Mouser Price/Stock=https://www.mouser.at/c/optoelectronics/led-lighting/led-emitters/standard-leds-smd/?series=CHIPLED%200603&instock=y
Q100 Q101 Q400 Q401: library part BC847A,235, "Transistor BJT NPN", Manufacturer_Name=Nexperia, Mouser Part Number=771-BC847A235, Arrow Part Number=BC847A,235, Arrow Price/Stock=https://www.arrow.com/en/products/bc847a235/nexperia, Datasheet Link=http://assets.nexperia.com/documents/data-sheet/BC847_SER.pdf, Height=1.1mm, Manufacturer_Part_Number=BC847A,235, Mouser Price/Stock=https://www.mouser.co.uk/ProductDetail/Nexperia/BC847A235?qs=me8TqzrmIYWeD%252BqPzufrRA%3D%3D
Q300 Q301 Q302 Q303: "MOSFET (N-Channel)", Manufacturer_Name=Vishay, Mouser Part Number=78-SIR680ADP-T1-RE3, Datasheet Link=https://componentsearchengine.com/Datasheets/2/SIR680ADP-T1-RE3.pdf, Height=1.12mm, Manufacturer_Part_Number=SIR680ADP-T1-RE3, Mouser Price/Stock=https://www.mouser.co.uk/ProductDetail/Vishay-Semiconductors/SIR680ADP-T1-RE3?qs=Cb2nCFKsA8raqFl13vB9OA%3D%3D
Q304 Q305 Q306 Q307: library part NMOS, "MOSFET (N-Channel)"
R100 R102 R103 R104 R105 R106 R107 R306 R307 R308 R309 R310 R311 R400 R403 R404 R409 R410 R411 R414 R504 R505 R506 R507 R600 R601 R602 RADJ200 RT200: library part R0603, "Resistor", Arrow Part Number=ERJ-PA3J104V, Manufacturer_Name=Panasonic, Mouser Part Number=667-ERJ-PA3J104V, Arrow Price/Stock=https://www.arrow.com/en/products/erj-pa3j104v/panasonic, Datasheet Link=https://industrial.panasonic.com/cdbs/www-data/pdf/RDO0000/AOA0000C331.pdf, Height=0.55mm, Manufacturer_Part_Number=ERJ-PA3J104V, Mouser Price/Stock=https://www.mouser.co.uk/ProductDetail/Panasonic/ERJ-PA3J104V/?qs=BzJM0faLVqV4tD3ZRAThew%3D%3D
R101 R302 R303 R304 R305 R401 R402 R405 R406 R407 R408 R412 R413 R500 R501 R502 R503: library part R0402, "Resistor", Height=0.4mm
R300 R301: library part FC4L90R005FER, "Shunt", Manufacturer_Name=Ohmite, Mouser Part Number=588-FC4L90R005FER, Datasheet Link=https://componentsearchengine.com/Datasheets/2/FC4L90R005FER.pdf, Height=0.8mm, Manufacturer_Part_Number=FC4L90R005FER, Mouser Price/Stock=https://www.mouser.co.uk/ProductDetail/Ohmite/FC4L90R005FER?qs=lc2O%252BfHJPVbbUOwenJZbzA%3D%3D
S100: library part SW-SPST, "Switch"
S101: "Switch", Manufacturer_Name="Copal Electronics", Datasheet Link=https://www.nidec-copal-electronics.com/e/catalog/switch/cas.pdf, Height=2.5mm, Manufacturer_Part_Number=CAS-D20A1
S600: "Switch", Arrow Part Number=LMR62014XMF/NOPB, Manufacturer_Name="Texas Instruments", Mouser Part Number=926-LMR62014XMF/NOPB, Arrow Price/Stock=https://www.arrow.com/en/products/lmr62014xmfnopb/texas-instruments, Datasheet Link=http://www.ti.com/lit/gpn/lmr62014, Height=1.45mm, Manufacturer_Part_Number=LMR62014XMF/NOPB, Mouser Price/Stock=https://www.mouser.co.uk/ProductDetail/Texas-Instruments/LMR62014XMF-NOPB?qs=cN01o9PeIQtA177Vn0GXdQ%3D%3D
Y100: library part ABM8W-16.0000MHZ-8-B1U-T3, "Crystal or Oscillator", Manufacturer_Name=ABRACON, Mouser Part Number=815-8W16-8B1UT, Arrow Part Number=ABM8W-16.0000MHZ-8-B1U-T3, Arrow Price/Stock=https://www.arrow.com/en/products/abm8w-16.0000mhz-8-b1u-t3/abracon, Datasheet Link=https://abracon.com/Resonators/ABM8W.pdf, Height=0.75mm, Manufacturer_Part_Number=ABM8W-16.0000MHZ-8-B1U-T3, Mouser Price/Stock=https://www.mouser.co.uk/ProductDetail/ABRACON/ABM8W-160000MHZ-8-B1U-T3?qs=5aG0NVq1C4zuwTHNFUIcqw%3D%3D

## Free pads (board coordinates)
  round 6 hole 3.4: 2(3.81,3.81) 2(3.81,52.07) 2(95.25,3.81) 2(95.25,52.07)

## Via types
v1: diameter 0.6, hole 0.3, Top Layer to Bottom Layer, tented both sides, 24 vias

## Nets (pads, with @x,y where several pads share a name; then routed paths per layer and width w, separated by ;. In a path a pad name is that pad's centre, name@x,y a point inside that pad or via, vN(x,y) a via of type N, cw(c..) or ccw(c..) an arc to the next point about the centre after c; other vN are vias at no path point)
3V3: C106.1 C107.1 C108.1 C109.1 C110.1 C111.1 C112.1 C400.1 C402.2 C500.2 C601.1 D300.2 D301.2 D401.5 D402.5 D404.5 D500.5 FB100.1 IC100.1 IC100.16 IC100.32 IC100.48 IC100.64 IC400.5 IC600.2 IC600.4 J402.1 J403.1 J405.4 J500.1 R100.1 R400.2 R403.1 R404.1 S101.1 S101.4
+5: C203.1 C204.2 C600.1 C603.1 D400.1 D403.5 IC200.7 IC200.13 IC200.14 IC200.15 IC200.16 IC200.17 IC200.18 IC200.22 IC200.43 IC600.3 J404.4 L600.1 R409.2 R601.2 S600.5
+12: D302.2 D305.2 IC302.3 IC303.3 R104.2 R105.2
+12V: C602.1 C604.1 D600.1 R600.1
A3V3: C105.1 C304.2 C305.2 FB100.2 IC100.28 IC100.29 IC300.5 IC301.5 R302.2 R303.2
AGND: C101.1 C102.1 C103.1 C104.1 C105.2 C112.2 C304.1 C305.1 D300.1 D301.1 IC100.27 IC200.1 IC200.2 IC200.3 IC200.4 IC200.5 IC200.8 IC200.11 IC200.12 IC300.4 IC301.4 R304.1 R305.1 R308.1 R309.1 RADJ200.2 RT200.2
BOOST-BIN: IC100.41 IC303.2
BOOST-TIN: IC100.40 IC303.1
BOOT-CHGPMP-VIN: Q101.3 Q307.1 R105.1
BOOT-CHGPMP-VOUT: Q100.3 Q306.1 R104.1
BOOT-VIN-N: C307.2 IC303.8 L300.2 Q301.1 Q301.2 Q301.3 Q302.5 Q302.6 Q302.7 Q302.8 Q302.9 Q302.10 Q302.11 Q305.3
BOOT-VIN-P: C307.1 D304.1 IC303.6
BOOT-VOUT-N: C306.2 IC302.8 L300.1 Q300.1 Q300.2 Q300.3 Q303.5 Q303.6 Q303.7 Q303.8 Q303.9 Q303.10 Q303.11 Q304.3
BOOT-VOUT-P: C306.1 D303.1 IC302.6
BUCK-BIN: IC100.39 IC302.2
BUCK-TIN: IC100.38 IC302.1
DEBUG-LED1: IC100.33 R507.1
DEBUG-LED2: IC100.34 R506.1
DEBUG-LED3: IC100.35 R505.1
DEBUG-LED4: IC100.36 R504.1
INPUT-CURRENT-SA: C102.2 IC100.14 IC100.21 IC301.8
IO-I2C-SCL: D404.6 IC100.51 R401.1 R404.2
IO-I2C-SDA: D404.4 IC100.60 R402.1 R403.2
IO-SBUS-RX: IC100.44 Q401.3 R400.1
IO-SBUS-TX: IC100.25 R411.2
IO-SPI-MISO: D401.3 IC100.53 R406.1
IO-SPI-MOSI: D401.1 IC100.58 R405.1
IO-SPI-NCS: D401.6 IC100.62 R408.1
IO-SPI-SCL: D401.4 IC100.52 R407.1
NetC200_1: C200.1 C201.1 C202.1 D200.1 D201.1 IC200.26 IC200.27 IC200.28 IC200.42
NetC300_1: C300.1 C301.1 C311.1 C313.1 C314.1 Q300.5 Q300.6 Q300.7 Q300.8 Q300.9 Q300.10 Q300.11 R300.2
NetC302_1: C302.1 C303.1 C310.1 C312.1 C315.1 Q301.5 Q301.6 Q301.7 Q301.8 Q301.9 Q301.10 Q301.11 R301.3
NetC308_1: C308.1 D306.2 Q304.2
NetC308_2: C308.2 D302.1 D303.2 R310.2
NetC309_1: C309.1 D307.2 Q305.2
NetC309_2: C309.2 D304.2 D305.1 R311.2
NetC401_2: C401.2 R414.1
NetC602_2: C602.2 R600.2 R602.1 S600.3
NetCL101_2: CL101.2 R101.1 Y100.3
NetD306_1: D306.1 Q304.1 Q306.3 R310.1
NetD307_1: D307.1 Q305.1 Q307.3 R311.1
NetD400_2: D400.2 J401.1
NetD600_2: D600.2 L600.2 S600.1
NetIC300_2: IC300.2 R300.1 | length 14.8
  Top Layer w0.3: IC300.2 10.668,29.647 12.692,31.671 v1(12.692,33.528) ; v1(12.7,39.921) R300.1
  Mid Layer 2 w0.3: v1(12.692,33.528) 12.7,33.536 v1(12.7,39.921)
NetIC300_3: IC300.3 R300.4 | length 13.5
  Top Layer w0.3: IC300.3 10.16,30.297 11.684,31.821 v1(11.684,33.528) ; R300.4 v1(11.684,39.921)
  Mid Layer 2 w0.3: v1(11.684,33.528) v1(11.684,39.921)
NetIC300_6: IC300.6 IC300.7 R302.1 R304.2
NetIC301_2: IC301.2 R301.1 | length 13.9
  Top Layer w0.3: IC301.2 9.977,26.091 v1(11.684,24.384) ; R301.1 v1(11.684,15.959)
  Mid Layer 2 w0.3: v1(11.684,15.959) v1(11.684,24.384)
NetIC301_3: IC301.3 R301.4 | length 15.2
  Top Layer w0.3: IC301.3 10.343,26.741 v1(12.7,24.384) ; v1(12.7,15.959) R301.4
  Mid Layer 2 w0.3: v1(12.7,15.959) v1(12.7,24.384)
NetIC301_6: IC301.6 IC301.7 R303.1 R305.2
NetIC302_4: IC302.4 Q303.4
  other v1: 18.669,32.131
NetIC302_7: IC302.7 Q300.4
  other v1: 38.989,38.989
NetIC303_4: IC303.4 Q302.4
  other v1: 18.669,19.939
NetIC303_7: IC303.7 Q301.4
  other v1: 35.179,16.891
NetJ401_6: J401.6 J401.7 J401.8 J401.9 J401.10 J401.11 R414.2
NetJ402_2: J402.2 R405.2
NetJ402_3: J402.3 R406.2
NetJ402_4: J402.4 R407.2
NetJ402_5: J402.5 R408.2
NetJ403_2: J403.2 R412.2
NetJ403_3: J403.3 R413.2
NetJ405_2: J405.2 R402.2
NetJ405_3: J405.3 R401.2
NetJ500_2: J500.2 R500.1
NetJ500_4: J500.4 R501.1
NetJ500_6: J500.6 R502.1
NetJ500_10: J500.10 R503.1
NetLED500_2: LED500.2 R504.2
NetLED501_2: LED501.2 R505.2
NetLED502_2: LED502.2 R506.2
NetLED503_2: LED503.2 R507.2
NetQ100_1: Q100.1 R106.1
NetQ101_1: Q101.1 R107.1
NetQ400_1: Q400.1 R411.1
NetQ401_1: Q401.1 R410.1
NetR102_1: R102.1 S101.2
NetR103_1: R103.1 S101.5
NetR601_1: R601.1 S600.4
OUTPUT-CURRENT-SA: C101.2 IC100.17 IC100.20 IC300.8
PGND: C100.2 C106.2 C107.2 C108.2 C109.2 C110.2 C111.2 C200.2 C201.2 C202.2 C203.2 C204.1 C300.2 C301.2 C302.2 C303.2 C310.2 C311.2 C312.2 C313.2 C314.2 C315.2 C400.2 C401.1 C402.1 C500.1 C600.2 C601.2 C603.2 C604.2 CL100.1 CL101.1 D401.2 D402.2 D403.2 D404.2 D500.2 IC100.15 IC100.31 IC100.47 IC100.63 IC200.19 IC200.29 IC200.30 IC200.31 IC200.32 IC200.33 IC200.41 IC302.9 IC303.9 IC400.2 IC600.1 J400.MP1 J400.MP2 J401.5 J402.6 J402.MP1 J402.MP2 J403.4 J403.MP1 J403.MP2 J404.1 J405.1 J405.MP1 J405.MP2 J500.3 J500.5 J500.9 LED500.1 LED501.1 LED502.1 LED503.1 P302.1 P303.1 Q100.2 Q101.2 Q302.1 Q302.2 Q302.3 Q303.1 Q303.2 Q303.3 Q306.2 Q307.2 Q400.2 Q401.2 R602.2 S100.1 S100.3 S101.3 S101.6 S600.2 Y100.2 Y100.4
  other v1: 28.448,5.08 29.464,5.08 30.48,5.08 31.496,5.08 32.512,5.08 33.528,5.08 28.448,50.8 29.464,50.8 30.48,50.8 31.496,50.8 32.512,50.8 33.528,50.8
RT: IC200.9 RT200.1
RTSEL: IC200.10
SBUS-RX: D403.6 J404.2 R410.2
SBUS-TX: D403.4 J404.3 Q400.3 R409.1
STM32-ADC12-1: C104.2 D301.3 IC100.12 R307.1 R309.2
STM32-ADC12-2: C103.2 D300.3 IC100.13 R306.1 R308.2
STM32-NRST: C100.1 D500.6 IC100.7 R100.2 R503.2 S100.2 S100.4
STM32-PWM1: IC100.42 R107.2
STM32-PWM2: IC100.43 R106.2
STM32-SW-AUX: IC100.57 R102.2
STM32-SW-BOOT: IC100.61 R103.2
STM32-XC-IN: CL100.2 IC100.5 Y100.1
STM32-XC-OUT: IC100.6 R101.2
SWD.SWDCLK: D500.3 IC100.50 R501.2
SWD.SWDIO: D500.1 IC100.49 R500.2
SWD.SWO: D500.4 IC100.56 R502.2
UART-RX: D402.4 IC100.55 R412.1
UART-TX: D402.6 IC100.54 R413.1
USB-CON_N: IC400.1 J401.2
USB-CON_P: IC400.3 J401.3
USB-MCU.USBD_N: IC100.46 IC400.6
USB-MCU.USBD_P: IC100.45 IC400.4
VADJ: IC200.24 RADJ200.1
VBat: D201.2 P300.1 R300.3 R306.2
VPanel: D200.2 P301.1 R301.2 R307.2
pads on no net: D402.1 D402.3 D403.1 D403.3 D404.1 D404.3 IC100.2 IC100.3 IC100.4 IC100.8 IC100.9 IC100.10 IC100.11 IC100.18 IC100.19 IC100.22 IC100.23 IC100.24 IC100.26 IC100.30 IC100.37 IC100.59 IC200.6 IC200.20 IC200.21 IC200.23 IC200.25 IC200.34 IC200.35 IC200.36 IC200.37 IC200.38 IC200.39 IC200.40 IC300.1 IC301.1 IC302.5 IC303.5 J400.1 J400.2 J400.3 J400.4 J401.4 J404.MP1 J404.MP2 J500.7 J500.8 J700.01 J700.02 J700.03 J700.04 J700.05 J700.06 J700.07 J700.08 J700.09 J700.10 J701.01 J701.02 J701.03 J701.04 J701.05 J701.06 J701.07 J701.08 J701.09 J701.10 J702.01 J702.02 J702.03 J702.04 J702.05 J702.06 J702.07 J702.08 J702.09 J702.10 J703.01 J703.02 J703.03 J703.04 J703.05 J703.06 J703.07 J703.08 J703.09 J703.10

## Polygon pours and split planes (outlines as drawn)
PGND on Top Layer "PGND_L01_P049" (solid, pour order 49): 28.104,6.92 33.872,6.92 33.872,4.916 33.528,4.572 28.448,4.572 28.104,4.916 28.104,5.66
PGND on Top Layer "PGND_L01_P048" (solid, pour order 48): 28.104,48.96 33.872,48.96 33.872,50.964 33.528,51.308 28.448,51.308 28.104,50.964 28.104,50.22
NetC302_1 on Top Layer "NETC302_1_L01_P047" (solid, pour order 47): 13.592,6.509 14.992,6.509 15.659,5.842 25.626,5.842 28.104,8.32 37.021,8.32 39.294,10.593 39.294,14.858 39.039,15.113 35.129,15.113 33.872,13.856 33.872,13.524 15.777,13.524 14.992,14.309 13.592,14.309
NetC300_1 on Top Layer "NETC300_1_L01_P046" (solid, pour order 46): 13.592,49.371 14.992,49.371 15.659,50.038 25.626,50.038 28.104,47.56 37.021,47.56 39.294,45.287 39.294,41.022 39.039,40.767 35.129,40.767 33.872,42.024 33.872,42.356 15.777,42.356 14.992,41.571 13.592,41.571
BOOT-VIN-N on Top Layer "BOOT-VIN-N_L01_P045" (solid, pour order 45): 39.294,15.933 39.294,17.203 40.001,17.91 40.196,17.91 40.196,21.735 27.876,21.735 27.876,17.91 35.437,17.91 36.144,17.203 36.144,15.933
BOOT-VOUT-N on Top Layer "BOOT-VOUT-N_L01_P044" (solid, pour order 44): 38.024,39.947 34.874,39.947 34.874,38.677 34.167,37.97 27.876,37.97 27.876,34.145 40.196,34.145 40.196,37.97 38.731,37.97 38.024,38.677
PGND on Top Layer (solid, pour order 43): 22.919,18.542 24.025,17.436 33.872,17.436 33.872,14.924 28.104,14.924 27.422,14.242 17.254,14.242 15.748,15.748 15.748,17.272 8.572,17.272 8.572,14.448 8.484,14.36 0.66,14.36 0.66,20.184 8.484,20.184 11.668,23.368 13.708,23.368 13.708,34.536 13.716,34.544 9.636,34.544 8.484,35.696 0.66,35.696 0.66,41.52 8.484,41.52 8.572,41.432 8.572,38.608 15.748,38.608 15.748,40.132 17.254,41.638 27.422,41.638 28.104,40.956 33.872,40.956 33.872,38.444 24.025,38.444 22.919,37.338 20.769,37.338 19.677,36.246 19.627,36.246 19.627,33.096 18.357,33.096 17.78,32.519 17.78,24.384 18.11,24.054 19.627,24.054 19.627,20.904 18.357,20.904 17.272,19.819 17.272,18.796 17.526,18.542
VPanel on Top Layer "VPANEL_L01_P037" (solid, pour order 37): 0.66,7.756 8.484,7.756 9.392,6.848 9.392,6.509 10.792,6.509 10.792,14.309 9.392,14.309 8.663,13.58 0.66,13.58
VBat on Top Layer "VBAT_L01_P036" (solid, pour order 36): 0.66,42.3 8.663,42.3 9.392,41.571 10.792,41.571 10.792,49.371 9.392,49.371 9.392,49.032 8.484,48.124 0.66,48.124
no net on Mid Layer 1 "NONET_L02_P028" (solid, remove dead copper, pour order 28): 0,55.88 99.06,55.88 99.06,0 0,0

## Keep-outs
Keep-Out Layer:
  the board outline again, w0.5

## Silkscreen, mask and mechanical layers (free items; w line width, h text height)
Board:
  the board outline again, w0.254

## Text inside footprints (layer, text, board x,y; h text height)
J500: Top Overlay "1" at 215.14,92.001 h0.76